# Altium PCB pcb.pcbdoc
Units mm, origin at the board's own origin, x right, y up, seen from the top; angles counter-clockwise.
Board outline 123.19 x 112.27 mm, 2 copper layers (Top Layer, Bottom Layer); 4 components, 10 nets, 108 pads, 0 vias.
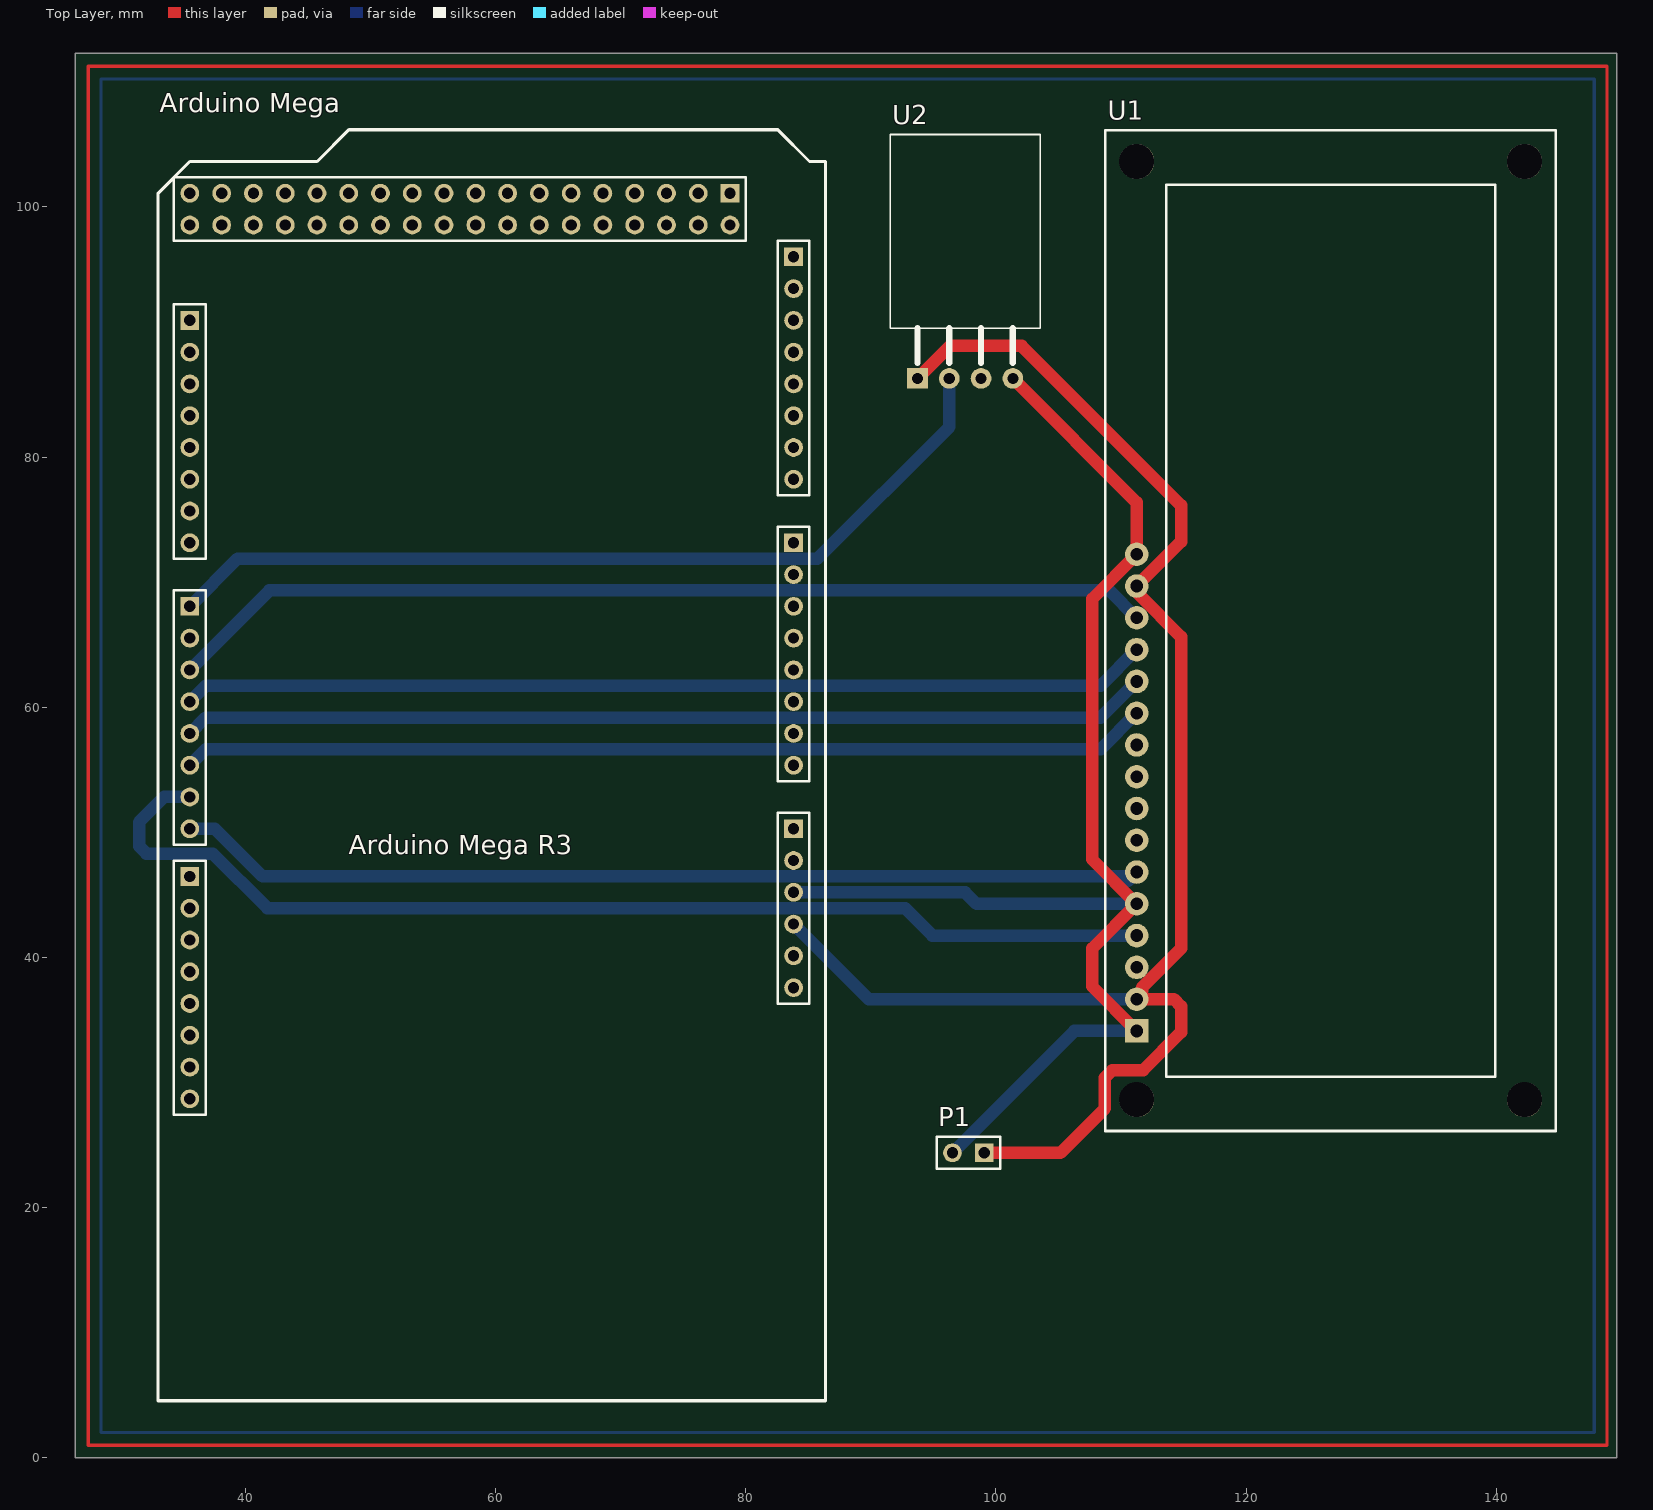
[diagram p0: Top Layer view]
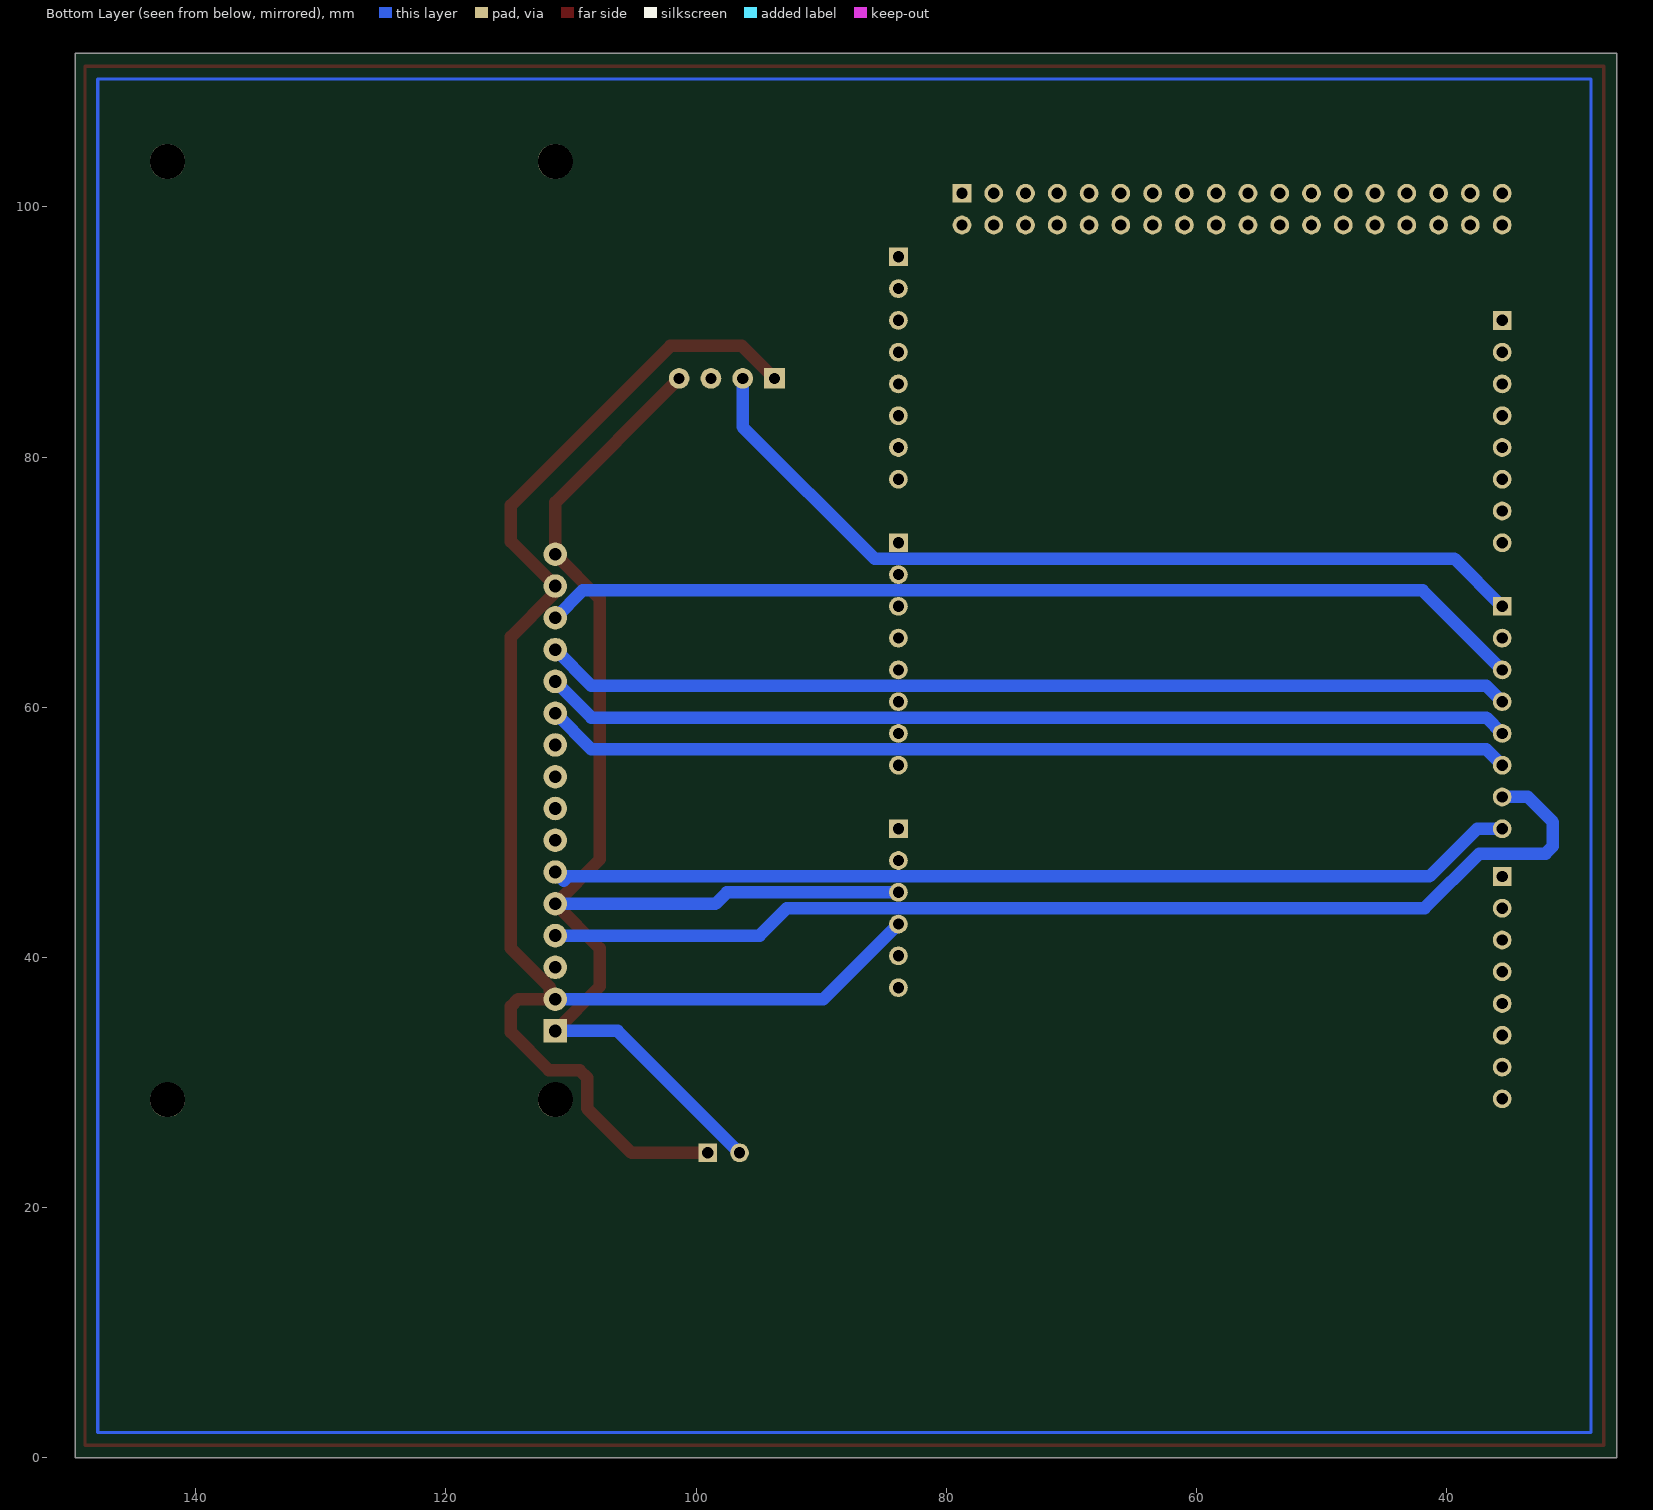
[diagram p1: Bottom Layer view, seen from below]

## Layer stack, top to bottom
Top Solder: solder mask 0.0102, Solder Resist, Dk 3.5
Top Layer: signal copper 0.0356
Dielectric 1: dielectric 0.32, FR-4, Dk 4.8
Bottom Layer: signal copper 0.0356
Bottom Solder: solder mask 0.0102, Solder Resist, Dk 3.5

## Board outline
26.416,0 149.606,0 149.606,112.268 26.416,112.268

## Design rules (kind name [scope] priority, off if disabled: settings)
Clearance [All] p1: gap=0.006 ignorepadtopadclearanceinfootprint=FALSE
PolygonConnect [All] p1: connectstyle=Relief reliefconductorwidth=0.254 reliefentries=4 polygonreliefangle="90 Angle" airgapwidth=0.254
RoutingVias [All] p1: holewidth=0.711 width=1.27 viastyle="Through Hole" minholewidth=0.711 minwidth=1.27 maxholewidth=0.711 maxwidth=1.27
SolderMaskExpansion [All] p1: expansion=0.102 istentingtop=FALSE
Width MainWidth [All] p1: maxlimit=1 minlimit=1 preferedwidth=1 minimp=50.000000 maximp=50.000000 favimp=50.000000
30 further rules are at their usual default settings.

## Components (designator, comment, footprint, x,y, rotation, side; value= is the part's Value field where it differs from the comment)
"Arduino Mega" "ARDUINO MEGA" "ARDUINO MEGA" 58.42,57.912 r90 top
P1 "Header 2" HDR1X2 99.06,24.384 r180 top
U1 "LCD-16X2" *LCD-16X2 126.752,66.132 r90 top
U2 "DHT11" SNR4-2.54-15.5X12.0X5.5MM 97.536,98.044 r90 top

## Footprints (in the part's own frame and the unit in brackets; to place one, negate y for a bottom-side part, rotate by r counter-clockwise, add the part's x,y. Pads: shape width x height; smd on the part's side, far side on the other; paste and mask are expansions set on the pad)
*LCD-16X2 [mm]
  rect 1.88x1.88 hole 1.016: 1(-32,15.5)
  round 1.88 hole 1.016: 2(-29.46,15.5) 3(-26.92,15.5) 4(-24.38,15.5) 5(-21.84,15.5) 6(-19.3,15.5) 7(-16.76,15.5) 8(-14.22,15.5) 9(-11.68,15.5) 10(-9.14,15.5) 11(-6.6,15.5) 12(-4.06,15.5) 13(-1.52,15.5) 14(1.02,15.5) 15(3.56,15.5) 16(6.1,15.5)
  round 2.8 hole 2.8 unplated: None(-37.5,-15.5) None(-37.5,15.5) None(37.5,-15.5) None(37.5,15.5)
  silkscreen extent -40,-18 40,18
"ARDUINO MEGA" [mm] "Arduino Mega 2560"
  rect 1.5x1.5 hole 0.9: 0(10.16,22.86) 8(-11.43,22.86) 21(33.02,22.86) 59(-7.62,-25.4) 67(15.24,-25.4) 75(38.1,-25.4) 79(43.18,-20.32)
  round 1.5 hole 0.9: 1(7.62,22.86) 2(5.08,22.86) 3(2.54,22.86) 4(0,22.86) 5(-2.54,22.86) 6(-5.08,22.86) 7(-7.62,22.86) 9(-13.97,22.86) 10(-16.51,22.86) 11(-19.05,22.86) 12(-21.59,22.86) 13(-24.13,22.86) 14(15.24,22.86) 15(17.78,22.86) 16(20.32,22.86) 17(22.86,22.86) 18(25.4,22.86) 19(27.94,22.86) 20(30.48,22.86) 22(40.64,20.32) 23(43.18,20.32) 24(40.64,17.78) 25(43.18,17.78) 26(40.64,15.24) 27(43.18,15.24) 28(40.64,12.7) 29(43.18,12.7) 30(40.64,10.16) 31(43.18,10.16) 32(40.64,7.62) 33(43.18,7.62) 34(40.64,5.08) 35(43.18,5.08) 36(40.64,2.54) 37(43.18,2.54) 38(40.64,0) 39(43.18,0) 40(40.64,-2.54) 41(43.18,-2.54) 42(40.64,-5.08) 43(43.18,-5.08) 44(40.64,-7.62) 45(43.18,-7.62) 46(40.64,-10.16) 47(43.18,-10.16) 48(40.64,-12.7) 49(43.18,-12.7) 50(40.64,-15.24) 51(43.18,-15.24) 52(40.64,-17.78) 53(43.18,-17.78) 54(-20.32,-25.4) 55(-17.78,-25.4) 56(-15.24,-25.4) 57(-12.7,-25.4) 58(-10.16,-25.4) 60(-2.54,-25.4) 61(0,-25.4) 62(2.54,-25.4) 63(5.08,-25.4) 64(7.62,-25.4) 65(10.16,-25.4) 66(12.7,-25.4) 68(20.32,-25.4) 69(22.86,-25.4) 70(25.4,-25.4) 71(27.94,-25.4) 72(30.48,-25.4) 73(33.02,-25.4) 74(35.56,-25.4) 76(-26.67,22.86) 77(-29.21,22.86) 78(40.64,-20.32) 80(43.18,22.86) 81(40.64,22.86)
  silkscreen extent -53.34,-27.94 48.26,25.4
HDR1X2 [mm] "Connector; Header; 2 Position"
  rect 1.5x1.5 hole 0.9: 1(0,0)
  round 1.5 hole 0.9: 2(2.54,0)
  silkscreen extent -1.27,-1.27 3.81,1.27
SNR4-2.54-15.5X12.0X5.5MM [mil]
  rect 65x65 hole 35: 1(-462.6,150)
  round 65 hole 35: 2(-462.6,50) 3(-462.6,-50) 4(-462.6,-150)
  silkscreen extent -413,-236 305,236

## Part data
P1: "Header, 2-Pin", LatestRevisionDate=17-Jul-2002, LatestRevisionNote="Re-released for DXP Platform.", Publisher="Altium Limited"
U1: "Display Development Tools 16x2 Black on Green Char LCD w Backlight", Package=None, Availability="In Stock", Check_prices=https://www.snapeda.com/parts/LCD-16X2/Gravitech/view-part/?ref=eda, MF=Gravitech, MP=LCD-16X2, Price=None, Purchase-URL=https://pricing.snapeda.com/search/part/LCD-16X2/?ref=eda, SnapEDA_Link=https://www.snapeda.com/parts/LCD-16X2/Gravitech/view-part/?ref=snap
U2: library part TEM-HUM-DHT11(4P-15.5X12.0MM), "Servo AC 100 ~ 120VAC Supply 10A 120V Load", Package=None, Availability="In Stock", Check_prices=https://www.snapeda.com/parts/DHT11/Panasonic/view-part/6618018/?ref=eda, MF="Panasonic Industrial Automation Sales", MP=DHT11, Price=None, Purchase-URL=https://pricing.snapeda.com/search/part/DHT11/?ref=eda, SnapEDA_Link=https://www.snapeda.com/parts/DHT11/Panasonic/view-part/6618018/?ref=snap

## Nets (pads, with @x,y where several pads share a name; then routed paths per layer and width w, separated by ;. In a path a pad name is that pad's centre, name@x,y a point inside that pad or via, vN(x,y) a via of type N, cw(c..) or ccw(c..) an arc to the next point about the centre after c; other vN are vias at no path point)
GND: "Arduino Mega.57" P1.2 U1.1 U1.5 U1.16 U2.4 | length 108.7
  Top Layer w1: U2.4 111.252,76.388 U1.16 107.696,68.676 107.696,47.848 U1.5 107.696,40.736 107.696,37.688 U1.1
  Bottom Layer w1: 83.82,45.212 97.536,45.212 98.456,44.292 U1.5 ; P1.2 106.268,34.132 U1.1
"NetArduino Mega_0": "Arduino Mega.0" U2.2 | length 70.5
  Bottom Layer w1: 35.56,68.072 39.37,71.882 85.725,71.882 96.266,82.423 U2.2
"NetArduino Mega_2": "Arduino Mega.2" U1.14 | length 79.2
  Bottom Layer w1: 35.56,62.992 41.91,69.342 109.062,69.342 U1.14
"NetArduino Mega_3": "Arduino Mega.3" U1.13 | length 77.4
  Bottom Layer w1: 35.56,60.452 36.83,61.722 108.362,61.722 U1.13
"NetArduino Mega_4": "Arduino Mega.4" U1.12 | length 77.4
  Bottom Layer w1: 35.56,57.912 36.83,59.182 108.362,59.182 U1.12
"NetArduino Mega_5": "Arduino Mega.5" U1.11 | length 77.4
  Bottom Layer w1: 35.56,55.372 36.83,56.642 108.362,56.642 U1.11
"NetArduino Mega_6": "Arduino Mega.6" U1.4 | length 89.5
  Bottom Layer w1: 35.56,52.832 33.497,52.832 31.496,50.831 31.496,48.897 32.082,48.311 37.389,48.311 41.758,43.942 92.735,43.942 94.925,41.752 U1.4
"NetArduino Mega_7": "Arduino Mega.7" U1.6 | length 77.7
  Bottom Layer w1: 35.56,50.292 37.559,50.292 41.369,46.482 110.211,46.482 110.556,46.136 U1.6
NetR1_2: U1.3
VCC: "Arduino Mega.56" P1.1 U1.2 U1.15 U2.1 | length 128.3
  Top Layer w1: U2.1 96.332,88.9 102.057,88.9 114.808,76.149 114.808,73.248 U1.15 111.42,69.524 111.42,69.029 114.808,65.641 114.808,40.723 111.692,37.607 111.692,37.35 111.252,36.91 U1.2 114.222,36.672 114.808,36.086 114.808,34.036 111.76,30.988 109.298,30.988 108.712,30.402 108.712,27.94 105.156,24.384 P1.1
  Bottom Layer w1: 83.82,42.672 89.82,36.672 U1.2
pads on no net: "Arduino Mega.1" "Arduino Mega.8" "Arduino Mega.9" "Arduino Mega.10" "Arduino Mega.11" "Arduino Mega.12" "Arduino Mega.13" "Arduino Mega.14" "Arduino Mega.15" "Arduino Mega.16" "Arduino Mega.17" "Arduino Mega.18" "Arduino Mega.19" "Arduino Mega.20" "Arduino Mega.21" "Arduino Mega.22" "Arduino Mega.23" "Arduino Mega.24" "Arduino Mega.25" "Arduino Mega.26" "Arduino Mega.27" "Arduino Mega.28" "Arduino Mega.29" "Arduino Mega.30" "Arduino Mega.31" "Arduino Mega.32" "Arduino Mega.33" "Arduino Mega.34" "Arduino Mega.35" "Arduino Mega.36" "Arduino Mega.37" "Arduino Mega.38" "Arduino Mega.39" "Arduino Mega.40" "Arduino Mega.41" "Arduino Mega.42" "Arduino Mega.43" "Arduino Mega.44" "Arduino Mega.45" "Arduino Mega.46" "Arduino Mega.47" "Arduino Mega.48" "Arduino Mega.49" "Arduino Mega.50" "Arduino Mega.51" "Arduino Mega.52" "Arduino Mega.53" "Arduino Mega.54" "Arduino Mega.55" "Arduino Mega.58" "Arduino Mega.59" "Arduino Mega.60" "Arduino Mega.61" "Arduino Mega.62" "Arduino Mega.63" "Arduino Mega.64" "Arduino Mega.65" "Arduino Mega.66" "Arduino Mega.67" "Arduino Mega.68" "Arduino Mega.69" "Arduino Mega.70" "Arduino Mega.71" "Arduino Mega.72" "Arduino Mega.73" "Arduino Mega.74" "Arduino Mega.75" "Arduino Mega.76" "Arduino Mega.77" "Arduino Mega.78" "Arduino Mega.79" "Arduino Mega.80" "Arduino Mega.81" U1.7 U1.8 U1.9 U1.10 U1.None U2.3
copper on no net: | length 918.5
  Top Layer w0.254: 27.432,1.016 148.844,1.016 148.844,111.252 27.432,111.252 27.432,1.016
  Bottom Layer w0.254: 28.448,2.032 147.828,2.032 147.828,110.236 28.448,110.236 28.448,2.032

## Text inside footprints (layer, text, board x,y; h text height)
"Arduino Mega": Top Overlay "Arduino Mega R3" at 48.26,48.26 h1.52
U1: Mechanical 4 "1" at 111.762,31.842 h1.88 r90; Mechanical 4 "1" at 111.762,31.842 h1.88 r90